# EAGLE board usbl (EAGLE 5.11)
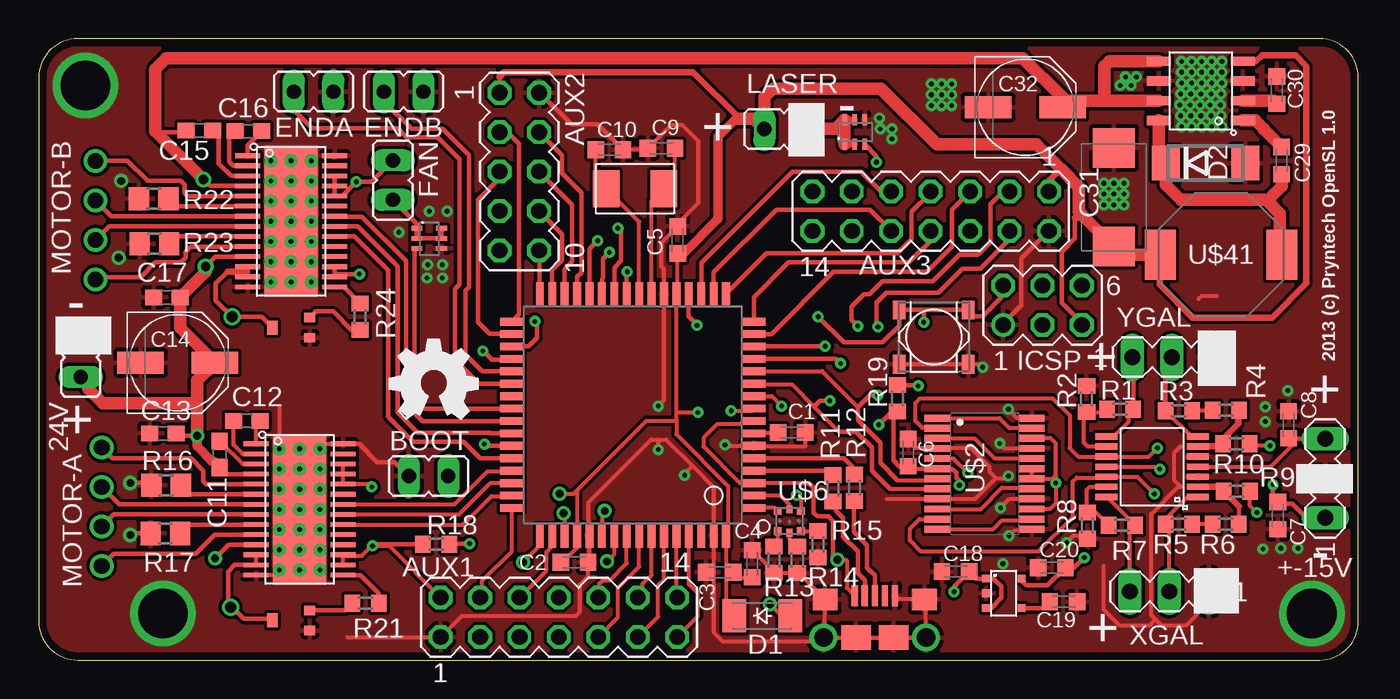
[diagram p0: board, top side]
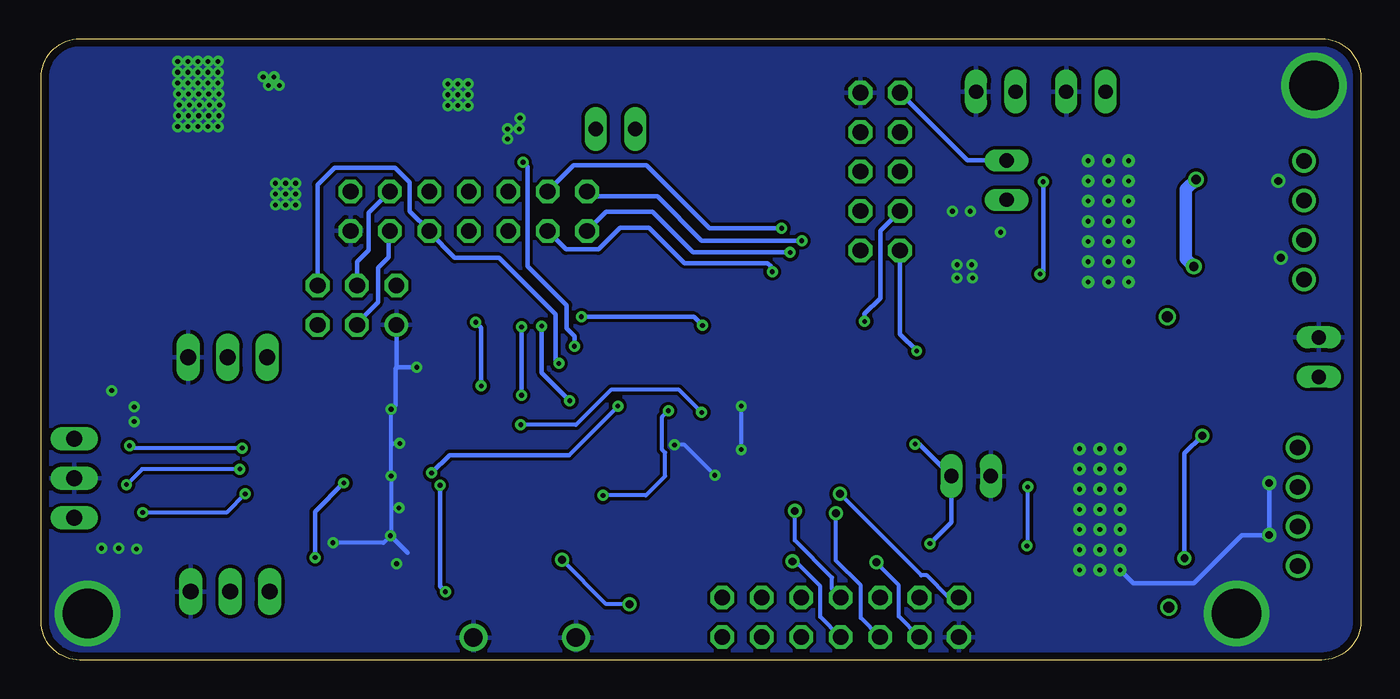
[diagram p1: board, bottom side, seen from below]

Size 85 x 40 mm. Coordinates in mm from the lower left corner, seen from the top.
Outline: 2.5,40 arc90 0,37.5 0,2.5 arc90 2.5,0 82.5,0 arc90 85,2.5 85,37.5 arc90 82.5,40 2.5,40
Copper layers (1*16): Top 0.035mm / dielectric 1.5mm / Bottom 0.035mm
Design rules "default *": minimum track width 10mil, minimum drill 0.3mm, track to track 8mil, track to pad 8mil, pad to pad 8mil, via to via 8mil, smd to smd 0mil, copper to edge 0.5mm, drill to drill 8mil, minimum pad ring 10mil, minimum via ring 8mil, stop-mask expansion 4mil, vias tented up to drill 0.6mm, thermal gap 10mil

## Footprints (pad centres in the part's own frame; a part is rotated, then mirrored left to right if it is on the bottom)
JP1 = drill 0.914 long: 1 0,-1.27; 2 0,1.27
MA03-1 = drill 1.016 long: 1 -2.54,0; 2 0,0; 3 2.54,0
MA07-2 = drill 1.016 octagon: 1 -7.62,-1.27; 2 -7.62,1.27; 3 -5.08,-1.27; 4 -5.08,1.27; 5 -2.54,-1.27; 6 -2.54,1.27; 7 0,-1.27; 8 0,1.27; 9 2.54,-1.27; 10 2.54,1.27; 11 5.08,-1.27; 12 5.08,1.27; 13 7.62,-1.27; 14 7.62,1.27
MA05-2 = drill 1.016 octagon: 1 -5.08,-1.27; 2 -5.08,1.27; 3 -2.54,-1.27; 4 -2.54,1.27; 5 0,-1.27; 6 0,1.27; 7 2.54,-1.27; 8 2.54,1.27; 9 5.08,-1.27; 10 5.08,1.27
C0603K = smd 1.05 x 1.08: 1 -0.875,0; 2 0.875,0
C0603 = smd 1.1 x 1: 1 -0.85,0; 2 0.85,0
PANASONIC_D = smd 3 x 1.4: + 2.4,0; - -2.4,0
D/7343-31R = smd 2.55 x 2.7: + 3.175,0; - -3.175,0
SOD-123_MINI-SMA = smd 1.5 x 2.1: A 1.8,0; C -1.8,0
DO214AA = smd 1.8 x 2.2: A 2.55,0; C -2.55,0
MA03-2 = drill 1.016 round: 1 -2.54,-1.27 | drill 1.016 octagon: 2 -2.54,1.27; 3 0,-1.27; 4 0,1.27; 5 2.54,-1.27; 6 2.54,1.27
1X04 = drill 1.016 round: 1 -2.54,0; 2 0,0; 3 2.54,0; 4 5.08,0
R0603 = smd 1 x 1.1: 1 -0.85,0; 2 0.85,0
R0805 = smd 1.3 x 1.5: 1 -0.95,0; 2 0.95,0
TQFP64 = smd 1.5 x 0.5: P$1 -7.8,6; P$2 -7.8,5.2; P$3 -7.8,4.4; P$4 -7.8,3.6; P$5 -7.8,2.8; P$6 -7.8,2; P$7 -7.8,1.2; P$8 -7.8,0.4; P$9 -7.8,-0.4; P$10 -7.8,-1.2; P$11 -7.8,-2; P$12 -7.8,-2.8; P$13 -7.8,-3.6; P$14 -7.8,-4.4; P$15 -7.8,-5.2; P$16 -7.8,-6; P$33 7.8,-6; P$34 7.8,-5.2; P$35 7.8,-4.4; P$36 7.8,-3.6; P$37 7.8,-2.8; P$38 7.8,-2; P$39 7.8,-1.2; P$40 7.8,-0.4; P$41 7.8,0.4; P$42 7.8,1.2; P$43 7.8,2; P$44 7.8,2.8; P$45 7.8,3.6; P$46 7.8,4.4; P$47 7.8,5.2; P$48 7.8,6 | smd 0.5 x 1.5: P$17 -6,-7.8; P$18 -5.2,-7.8; P$19 -4.4,-7.8; P$20 -3.6,-7.8; P$21 -2.8,-7.8; P$22 -2,-7.8; P$23 -1.2,-7.8; P$24 -0.4,-7.8; P$25 0.4,-7.8; P$26 1.2,-7.8; P$27 2,-7.8; P$28 2.8,-7.8; P$29 3.6,-7.8; P$30 4.4,-7.8; P$31 5.2,-7.8; P$32 6,-7.8; P$49 6,7.8; P$50 5.2,7.8; P$51 4.4,7.8; P$52 3.6,7.8; P$53 2.8,7.8; P$54 2,7.8; P$55 1.2,7.8; P$56 0.4,7.8; P$57 -0.4,7.8; P$58 -1.2,7.8; P$59 -2,7.8; P$60 -2.8,7.8; P$61 -3.6,7.8; P$62 -4.4,7.8; P$63 -5.2,7.8; P$64 -6,7.8
TSSOP24 = smd 1.635 x 0.44: P01 -3.05,3.575; P02 -3.05,2.925; P03 -3.05,2.275; P04 -3.05,1.625; P05 -3.05,0.975; P06 -3.05,0.325; P07 -3.05,-0.325; P08 -3.05,-0.975; P09 -3.05,-1.625; P10 -3.05,-2.275; P11 -3.05,-2.925; P12 -3.05,-3.575; P13 3.05,-3.575; P14 3.05,-2.925; P15 3.05,-2.275; P16 3.05,-1.625; P17 3.05,-0.975; P18 3.05,-0.325; P19 3.05,0.325; P20 3.05,0.975; P21 3.05,1.625; P22 3.05,2.275; P23 3.05,2.925; P24 3.05,3.575
TSSOP14 = smd 1.4 x 0.4: P$1 -2.95,1.95; P$2 -2.95,1.3; P$3 -2.95,0.65; P$4 -2.95,0; P$5 -2.95,-0.65; P$6 -2.95,-1.3; P$7 -2.95,-1.95; P$8 2.95,-1.95; P$9 2.95,-1.3; P$10 2.95,-0.65; P$11 2.95,0; P$12 2.95,0.65; P$13 2.95,1.3; P$14 2.95,1.95
TXC7A = smd 1.7 x 2.4: P$1 -1.85,0; P$2 1.85,0
MICROUSB = smd 1.6 x 1.4: GND1 -3.2,3.9; GND4 3.2,3.9 | smd 1.9 x 1.6: GND2 -1.2,1.45; GND3 1.2,1.45 | smd 0.4 x 1.35: P1 -1.3,4.15; P2 -0.65,4.15; P3 0,4.15; P4 0.65,4.15; P5 1.3,4.15 | drill 1.2 round: POST1 -3.3,1.45; POST2 3.3,1.45
OMRONLED = smd 0.5 x 0.5: P1 -0.75,-0.65; P3 0.75,-0.65; P4 0.75,0.65; P6 -0.75,0.65 | smd 0.4 x 0.5: P2 0,-0.75; P5 0,0.75
ETSSOP28 = smd 3.4 x 9.7: EPAD 0,0 | smd 1.6 x 0.3: P$1 -2.8,4.225; P$2 -2.8,3.575; P$3 -2.8,2.925; P$4 -2.8,2.275; P$5 -2.8,1.625; P$6 -2.8,0.975; P$7 -2.8,0.325; P$8 -2.8,-0.325; P$9 -2.8,-0.975; P$10 -2.8,-1.625; P$11 -2.8,-2.275; P$12 -2.8,-2.925; P$13 -2.8,-3.575; P$14 -2.8,-4.225; P$15 2.8,-4.225; P$16 2.8,-3.575; P$17 2.8,-2.925; P$18 2.8,-2.275; P$19 2.8,-1.625; P$20 2.8,-0.975; P$21 2.8,-0.325; P$22 2.8,0.325; P$23 2.8,0.975; P$24 2.8,1.625; P$25 2.8,2.275; P$26 2.8,2.925; P$27 2.8,3.575; P$28 2.8,4.225 | drill 0.3 pad 0.61 round: T0 -1.3,3.9; T1 0,3.9; T2 1.3,3.9; T3 -1.3,2.6; T4 0,2.6; T5 1.3,2.6; T6 -1.3,1.3; T7 0,1.3; T8 1.3,1.3; T9 -1.3,0; T10 0,0; T11 1.3,0; T12 -1.3,-1.3; T13 0,-1.3; T14 1.3,-1.3; T15 -1.3,-2.6; T16 0,-2.6; T17 1.3,-2.6; T18 -1.3,-3.9; T19 0,-3.9; T20 1.3,-3.9
POT22A = smd 0.6 x 0.7: L -0.65,-1.2; R 0.65,-1.2 | smd 0.9 x 0.7: POT 0,1.2
SOT363 = smd 0.7 x 0.3: P$1 -0.8,0.65; P$2 -0.8,0; P$3 -0.8,-0.65; P$4 0.8,-0.65; P$5 0.8,0; P$6 0.8,0.65
4PSWITCH = smd 0.8 x 1.2: P$1 -2.225,1.75; P$2 2.225,1.75; P$3 -2.225,-1.75; P$4 2.225,-1.75
TSOT23 = smd 0.5 x 0.5: P$1 0.95,1.15; P$2 0,1.15; P$3 -0.95,1.15; P$4 -0.95,-1.15; P$5 0.95,-1.15
SO8 = smd 1.55 x 0.6: P$1 -2.7,1.905; P$2 -2.705,0.635; P$3 -2.705,-0.635; P$4 -2.7,-1.905; P$5 2.7,-1.905; P$6 2.7,-0.635; P$7 2.7,0.635; P$8 2.7,1.905
INDUCTOR = smd 2 x 3.2: P$1 -3.9,0; P$2 3.9,0

## Placement (x,y rotation side)
24V  [JP1]  2.7,19.5 0 top
+-15V  [MA03-1]  82.86,11.7 90 top
AUX1  [MA07-2]  33.5,2.75 0 top
AUX2  [MA05-2]  30.95,31.45 270 top
AUX3  [MA07-2]  57.45,28.9 180 top
BOOT  [JP1]  25.1,11.85 270 top
C1  1u  [C0603K]  48.5,14.65 0 top
C2  0.1u  [C0603K]  34.5,6.3 180 top
C3  10u  [C0603K]  43.85,5.65 0 top
C4  0.1u  [C0603K]  45.95,6.2 270 top
C5  0.1u  [C0603K]  41.15,27.05 90 top
C6  0.1u  [C0603K]  56,13.35 270 top
C7  0.1u  [C0603K]  79.8,9.3 270 top
C8  0.1u  [C0603K]  80.5,15.15 270 top
C9  20p  [C0603K]  40.1,32.95 180 top
C10  20p  [C0603K]  36.75,32.85 0 top
C11  0.1u  [C0603]  11.65,13.25 270 top
C12  0.01u  [C0603]  13.4,15.4 0 top
C13  0.1u  [C0603]  8,14.6 180 top
C14  [PANASONIC_D]  8.95,19.15 0 top
C15  0.1u  [C0603]  10.35,34.1 180 top
C16  0.01u  [C0603]  13.5,34.05 0 top
C17  0.1u  [C0603]  8.25,23.35 180 top
C18  10u  [C0603K]  59.05,5.7 0 top
C19  10u  [C0603K]  66,3.75 180 top
C20  0.1u  [C0603K]  65.25,5.95 0 top
C29  0.1u  [C0603K]  80.05,32.15 90 top
C30  0.1u  [C0603K]  79.75,36.7 90 top
C31  68u  [D/7343-31R]  69.25,29.8 270 top
C32  100u  [PANASONIC_D]  63.55,35.6 0 top
D1  CGRM4001-G  [SOD-123_MINI-SMA]  46.6,2.85 0 top
D2  [DO214AA]  75.15,32 0 top
ENDA  [JP1]  17.7,36.6 90 top
ENDB  [JP1]  23.5,36.6 90 top
FAN  [JP1]  22.8,30.9 180 top
ICSP  [MA03-2]  64.65,22.85 0 top
LASER  [JP1]  48,34.2 270 top
MOTOR-A  [1X04]  4.05,8.6 90 top
MOTOR-B  [1X04]  3.65,27.05 90 top
R1  43k  [R0603]  69.65,16.16 180 top
R2  100k  [R0603]  67.49,16.81 90 top
R3  100k  [R0603]  73.42,16.06 180 top
R4  43k  [R0603]  76.47,16.09 180 top
R5  100k  [R0603]  73.42,8.74 180 top
R6  43k  [R0603]  76.44,8.74 180 top
R7  43k  [R0603]  69.77,8.69 180 top
R8  100k  [R0603]  67.53,8.66 270 top
R9  100k  [R0603]  77.16,10.88 180 top
R10  100k  [R0603]  77.14,13.93 180 top
R11  22R  [R0603]  51.15,11.05 270 top
R12  22R  [R0603]  52.55,11.1 270 top
R13  43k  [R0603]  47.35,6.45 270 top
R14  43k  [R0603]  48.85,6.45 270 top
R15  43k  [R0603]  50.2,7.45 270 top
R16  [R0805]  8.2,11.25 0 top
R17  [R0805]  8.15,8.15 0 top
R18  100k  [R0603]  25.6,7.45 0 top
R19  100k  [R0603]  55.3,16.85 90 top
R21  100k  [R0603]  21.05,3.65 0 top
R22  [R0805]  7.4,29.7 0 top
R23  [R0805]  7.45,26.8 0 top
R24  100k  [R0603]  20.7,22.1 90 top
U$1  AT90USB1286  [TQFP64]  38.27,15.79 180 top
U$2  AD5206  [TSSOP24]  60.92,12 0 top
U$3  OPA4171  [TSSOP14]  71.71,12.45 180 top
U$4  TXC7A  [TXC7A]  38.4,30.35 0 top
U$5  MICROUSB  [MICROUSB]  53.85,0 0 top
U$6  OMRONLED  [OMRONLED]  48.35,8.95 180 top
U$7  DRV8825  [ETSSOP28]  16.8,9.7 0 top
U$8  POT22A  [POT22A]  16.25,2.55 90 top
U$9  BSD816SN  [SOT363]  52.55,34 90 top
U$10  TL3315  [4PSWITCH]  57.65,20.8 0 top
U$11  DRV8825  [ETSSOP28]  16.25,28.25 0 top
U$12  POT22A  [POT22A]  16.25,21.4 90 top
U$13  BSD816SN  [SOT363]  25.15,27.15 0 top
U$14  CAT6219  [TSOT23]  62.15,4.3 90 top
U$15  [OSHW_FILLX200_NOTEXT]  22.6,15.55 0 top
U$40  MAX5035  [SO8]  74.85,36.65 180 top
U$41  100uH  [INDUCTOR]  76.15,26.1 0 top
XGAL  [MA03-1]  72.82,4.41 180 top
YGAL  [MA03-1]  72.98,19.5 0 top

## Library data of the parts
24V BOOT ENDA ENDB FAN LASER = jumper
+-15V AUX1-AUX3 ICSP XGAL YGAL = con-lstb; OC_FARNELL: unknown; OC_NEWARK: unknown
C1-C20 C29-C32 R1-R19 R21-R24 = rcl
D1 D2 = diode
MOTOR-A MOTOR-B = RepRapjr
U$1-U$14 U$40 U$41 = untitled
U$15 = ohw-logo

## Nets
+15: +-15V.3 C8.2 U$3.P$4
GND: 24V.2 +-15V.2 AUX1.1 AUX2.2 AUX3.2 BOOT.1 C1.2 C2.1 C3.1 C4.1 C5.2 C6.1 C7.2 C8.1 C9.2 C10.2 C13.2 C14.- C17.2 C18.1 C19.1 C20.1 C30.2 C31.- C32.- D2.A ENDA.1 ENDB.1 ICSP.1 R2.2 R8.2 R13.2 R14.2 R15.2 R16.1 R17.1 R22.1 R23.1 U$1.P$6 U$1.P$22 U$1.P$53 U$1.P$63 U$2.P04 U$2.P09 U$2.P13 U$2.P16 U$2.P21 U$2.P24 U$3.P$3 U$3.P$5 U$5.GND1 U$5.GND2 U$5.GND3 U$5.GND4 U$5.P5 U$5.POST1 U$5.POST2 U$7.EPAD U$7.P$14 U$7.P$28 U$7.T0 U$7.T1 U$7.T2 U$7.T3 U$7.T4 U$7.T5 U$7.T6 U$7.T7 U$7.T8 U$7.T9 U$7.T10 U$7.T11 U$7.T12 U$7.T13 U$7.T14 U$7.T15 U$7.T16 U$7.T17 U$7.T18 U$7.T19 U$7.T20 U$8.L U$9.P$4 U$10.P$3 U$10.P$4 U$11.EPAD U$11.P$14 U$11.P$28 U$11.T0 U$11.T1 U$11.T2 U$11.T3 U$11.T4 U$11.T5 U$11.T6 U$11.T7 U$11.T8 U$11.T9 U$11.T10 U$11.T11 U$11.T12 U$11.T13 U$11.T14 U$11.T15 U$11.T16 U$11.T17 U$11.T18 U$11.T19 U$11.T20 U$12.L U$13.P$4 U$14.P$2 U$40.P$3 U$40.P$6 XGAL.1 YGAL.3
N$1: U$2.P10 U$2.P17
N$2: U$2.P12 U$2.P14
N$3: C20.2 U$2.P15 U$2.P18 U$2.P19 U$2.P22 U$14.P$5
N$4: R11.1 U$1.P$4
N$5: U$2.P03 U$2.P20
N$6: U$2.P01 U$2.P23
N$7: R4.1 R10.2 U$3.P$6
N$8: R9.1 U$2.P11 U$3.P$12
N$9: R12.1 U$1.P$5
N$10: U$1.P$10 U$2.P05
N$11: AUX3.4 ICSP.3 U$1.P$12 U$2.P07
N$12: AUX3.3 ICSP.4 U$1.P$11 U$2.P08
N$13: R1.1 U$3.P$8 YGAL.1
N$14: R1.2 R2.1 U$3.P$9
N$15: R3.2 U$3.P$7 YGAL.2
N$16: R3.1 R4.2
N$17: R5.2 U$3.P$1 XGAL.2
N$18: R5.1 R6.2
N$19: R7.1 U$3.P$14 XGAL.3
N$20: R7.2 R8.1 U$3.P$13
N$21: R6.1 R9.2 U$3.P$2
N$22: R11.2 U$5.P2
N$23: R12.2 U$5.P3
N$24: D1.A U$1.P$3 U$1.P$8 U$5.P1
N$25: R10.1 U$2.P02 U$3.P$10
N$26: U$11.P$12 U$11.P$13 U$12.POT
N$27: C1.1 U$1.P$7
N$28: U$1.P$9 U$6.P1
N$29: U$1.P$2 U$6.P2
N$30: U$1.P$1 U$6.P3
N$31: R13.1 U$6.P4
N$32: +-15V.1 C7.1 U$3.P$11
N$33: R21.2 U$7.P$15
N$34: R14.1 U$6.P5
N$35: R15.1 U$6.P6
N$36: AUX1.13 U$1.P$61
N$37: C9.1 U$1.P$23 U$4.P$2
N$38: C10.1 U$1.P$24 U$4.P$1
N$39: AUX1.14 U$1.P$60
N$40: AUX1.11 U$1.P$59
N$41: AUX1.12 U$1.P$58
N$42: AUX1.10 U$1.P$56
N$43: AUX1.9 U$1.P$57
N$44: AUX1.7 U$1.P$55
N$45: AUX1.8 U$1.P$54
N$46: AUX1.5 U$1.P$51
N$47: AUX1.6 U$1.P$50
N$48: AUX1.3 U$1.P$49
N$49: AUX1.4 U$1.P$48
N$50: C12.2 U$7.P$1
N$51: C12.1 U$7.P$2
N$52: U$7.P$12 U$7.P$13 U$8.POT
N$53: MOTOR-A.3 U$7.P$7
N$54: U$1.P$47 U$7.P$20
N$55: U$1.P$46 U$7.P$21
N$56: U$1.P$45 U$7.P$22
N$57: R16.2 U$7.P$6
N$58: R17.2 U$7.P$9
N$59: C11.1 U$7.P$3
N$60: R21.1 U$8.R
N$61: MOTOR-A.2 U$7.P$8
N$62: MOTOR-A.4 U$7.P$5
N$63: MOTOR-A.1 U$7.P$10
N$64: U$1.P$44 U$11.P$20
N$65: U$1.P$42 U$11.P$21
N$66: U$1.P$41 U$11.P$22
N$67: R22.2 U$11.P$6
N$68: R23.2 U$11.P$9
N$69: C16.2 U$11.P$1
N$70: C16.1 U$11.P$2
N$71: C15.1 U$11.P$3
N$72: MOTOR-B.3 U$11.P$7
N$73: MOTOR-B.2 U$11.P$8
N$74: MOTOR-B.4 U$11.P$5
N$75: MOTOR-B.1 U$11.P$10
N$76: R24.2 U$11.P$15
N$77: R24.1 U$12.R
N$78: U$1.P$40 U$13.P$3
N$79: FAN.2 U$13.P$1 U$13.P$2 U$13.P$5 U$13.P$6
N$80: BOOT.2 R18.2 U$1.P$43
N$81: ENDB.2 U$1.P$37
N$82: AUX2.10 U$1.P$32
N$83: LASER.2 U$9.P$1 U$9.P$2 U$9.P$5 U$9.P$6
N$84: U$1.P$14 U$9.P$3
N$85: AUX2.8 U$1.P$31
N$86: AUX2.6 U$1.P$30
N$87: AUX2.4 U$1.P$29
N$88: AUX2.9 U$1.P$36
N$89: AUX2.7 U$1.P$35
N$90: AUX2.5 U$1.P$34
N$91: AUX2.3 U$1.P$33
N$92: AUX3.13 U$1.P$28
N$93: AUX3.14 U$1.P$27
N$94: AUX3.11 U$1.P$26
N$95: AUX3.12 U$1.P$25
N$96: AUX3.9 U$1.P$19
N$97: AUX3.10 U$1.P$18
N$98: AUX3.7 U$1.P$17
N$99: AUX3.8 U$1.P$16
N$100: AUX3.5 U$1.P$15
N$101: AUX3.6 ICSP.6 U$1.P$13
N$102: ENDA.2 U$1.P$38
N$103: ICSP.2 R19.2 U$1.P$20 U$10.P$1 U$10.P$2
N$104: C29.2 U$40.P$1
N$105: C29.1 D2.C U$40.P$8 U$41.P$2
N$106: C30.1 U$40.P$2
N$110: C19.2 U$14.P$4
VCC: AUX1.2 AUX2.1 AUX3.1 C2.2 C3.2 C4.2 C5.1 C6.2 C18.2 C31.+ D1.C FAN.1 ICSP.5 LASER.1 R18.1 R19.1 U$1.P$21 U$1.P$52 U$1.P$64 U$2.P06 U$7.P$16 U$7.P$17 U$7.P$24 U$7.P$25 U$7.P$26 U$11.P$16 U$11.P$17 U$11.P$24 U$11.P$25 U$11.P$26 U$14.P$1 U$14.P$3 U$40.P$4 U$41.P$1
VMOT: 24V.1 C11.2 C13.1 C14.+ C15.2 C17.1 C32.+ U$7.P$4 U$7.P$11 U$11.P$4 U$11.P$11 U$40.P$5 U$40.P$7

## Tracks (layer width: path | path; a pad name or v marks a point on that pad's centre or on a via)
+15
  Top 0.254: U$3.P$4 79.35,12.45 80.7,13.8
  Top 0.305: +-15V.3 80.53,14.24 C8.2 80.7,14.07 80.7,13.8
GND  (via drill 0.3, 0.5, 3.2)
  Top 0.254: 73.47,11.22 73.55,11.15 | 73.47,11.22 73.15,11.55 73.15,13.35 73.55,13.75 | YGAL.3 75.52,20.28 | 75.85,23.45 74.9,23.45 74.7,23.25 | XGAL.1 75.36,3.71 73.9,2.25 72.3,2.25 71.92,2.62 | 71.92,2.62 71.65,2.9 71.65,9.4 73.47,11.22 | U$2.P24 63.02,15.57 v62.45,16.15 | v62.5,8 62.85,8.35 63.9,8.35 U$2.P13 | 61.65,11.7 60.33,10.38 U$2.P09 54.62,10.38 | 61.65,11.7 62.4,11.7 62.45,11.75 v62.45,11.85 | U$2.P16 62.52,10.38 v61.95,9.8 | U$2.P21 62.23,13.62 v61.9,13.95 | 61.65,11.7 61.25,12.1 61.25,12.4 60.02,13.62 U$2.P04 57.84,13.65 56.45,13.65 56.45,13.78 C6.1 | 68.6,6.05 68.6,3.25 69.6,2.25 71.55,2.25 71.92,2.62 | 67.98,8.02 66.67,8.02 v66.2,7.55 | 42.1,12.5 40.4,14.2 39.9,14.2 | 42.1,12.5 43.47,11.13 U$1.P$63 43.47,5.65 | 39.9,14.2 39.45,14.2 35.4,10.15 35.4,8.06 U$1.P$53 35.47,6.29 C2.1 35.38,5.38 34.85,4.85 34.85,3.1 34.6,2.85 27.25,2.85 AUX1.1 19.87,1.48 | 50.17,1.07 U$5.POST1 | 50.17,1.07 50.05,0.95 | U$5.POST1 50.65,1.55 U$5.GND1 48.95,5.6 R14.2 | U$5.POST1 U$5.GND2 U$5.GND3 U$5.POST2 57.15,3.8 U$5.GND4 55.4,3.9 U$5.P5 | v44.2,13.85 44.26,13.79 U$1.P$6 46.11,13.75 49.35,13.75 49.38,13.78 C1.2 | v41.6,11.9 41.6,12 42.1,12.5 | 43.47,5.65 43.47,5.25 | 43.47,5.25 43.42,5.3 | 47.65,6 47.4,6 47.02,6 C4.1 | C10.2 39.12,32.85 C9.2 40.73,34.45 41.45,34.45 42.5,33.4 42.5,29.45 41.15,28.1 C5.2 40.1,26.88 40.1,25.35 40.27,25.18 U$1.P$22 40.27,16.72 v39.9,16.35 | 43.47,5.65 C3.1 | R14.2 R13.2 | R14.2 49.15,5.6 | 43.47,5.25 43.47,1.78 44.05,1.2 50.05,1.2 50.17,1.07 | 39.9,14.2 v39.9,13.55 | U$7.P$14 15.18,5.47 U$7.T18 U$7.T15 U$7.T12 U$7.T9 U$7.T6 U$7.T3 U$7.T0 | U$7.T0 U$7.T1 U$7.T2 | U$7.T5 U$7.T4
  Top 0.254: U$7.T7 U$7.EPAD U$7.T13 U$7.T16 U$7.T19 | U$7.T19 U$7.T20 U$7.T17 U$7.T14 U$7.T11 U$7.T8 U$7.T5 | U$7.P$28 18.43,13.93 U$7.T2 | U$7.T2 U$7.T5 | U$7.T19 16.95,5.65 | U$7.T0 15.5,16.3
  Top 0.305: R17.1 6,8.15 v5.9,8.05 | v5.9,11.4 7.1,11.4 R16.1 | R13.2 47.35,5.95 47.4,6 | U$7.P$28 20.62,13.93 21.8,12.75 22.93,12.75 BOOT.1 | AUX2.2 32.27,36.53 34.3,34.5 35.98,34.5 C10.2 | ICSP.1 62.11,21.66 63.3,22.85 63.3,25.86 AUX3.2 | U$10.P$3 U$10.P$4 60.6,19.05 v60.8,18.85
  Bottom 0.254: v62.45,11.85 62.45,9.8 | 62.45,9.8 62.45,8.05 v62.5,8 62.95,7.55 v66.2,7.55 | v62.45,11.85 62.45,13.8 | 62.45,13.8 62.45,16.1 v62.45,16.15 | v62.45,11.85 62.45,11.8 | 62.45,9.8 v61.95,9.8 | v61.9,13.95 62.3,13.95 62.45,13.8 | v44.2,13.85 43.55,13.85 v41.6,11.9 | v39.9,16.35 v39.9,13.55 39.9,13.4
  Bottom 0.305: v5.9,11.4 v5.9,8.05 7.65,8.05 10.75,4.95 14.65,4.95 U$7.T18 | v60.8,18.85 62.06,18.85 | v62.5,8 61.4,6.9 | 62.16,18.8 62.16,16.39 62.45,16.1 62.45,16.2 | ICSP.1 62.11,18.84 62.15,18.8 62.1,18.8
  other vias: 62.1,6.2 8,3 82,3 69.65,37 70.35,37 70,37.55 70.7,37.55 73.6,38.55 74.25,38.55 74.9,38.55 75.55,38.55 76.2,38.55 73.6,37.85 74.25,37.85 74.9,37.85 75.55,37.85 76.2,37.85 73.6,37.15 74.25,37.15 74.9,37.15 75.55,37.15 76.2,37.15 73.55,36.45 74.2,36.45 74.85,36.45 75.5,36.45 76.15,36.45 73.5,35.75 74.15,35.75 74.8,35.75 75.45,35.75 76.1,35.75 73.55,35.05 74.2,35.05 74.85,35.05 75.5,35.05 76.15,35.05 73.6,34.35 74.25,34.35 74.9,34.35 75.55,34.35 76.2,34.35 57.5,37.1 58.15,37.1 58.8,37.1 57.5,36.4 58.15,36.4 58.8,36.4 57.5,35.7 58.15,35.7 58.8,35.7 68.6,30.7 69.25,30.7 69.9,30.7 68.6,30 69.25,30 69.9,30 68.6,29.3 69.25,29.3 69.9,29.3 54.15,34.9 54.2,34.2 54.95,34.2 54.95,33.55 25.05,25.45 26,25.45 26,24.6 25,24.6 26.3,28.9 25.15,28.9 23.2,27.55 3,37 5.15,25.9 5.3,30.85 81.1,7.2 80,7.2 78.85,7.15 79,15.35 79,16.3 80.45,17.35
  pour Top: -1,40.6 103.7,42.35 103.3,-2.45 -5.85,-1.45 -3.85,36.85
  pour Bottom: -1.85,43.15 105.3,43.15 105.3,-2.45 -10,-2.45 -10,37
N$1
  Top 0.254: U$2.P10 60.67,9.72 62.05,11.1 63.9,11.1 U$2.P17
N$2
  Top 0.254: U$2.P12 61.48,8.43 62.05,9 63.9,9 U$2.P14
N$3  (via drill 0.3)
  Top 0.254: U$2.P15 65.12,9.72 65.5,10.1 v65.5,11.4 65.25,11.65 | 65.25,11.65 63.99,11.65 U$2.P18 U$2.P19 | U$2.P22 65.17,14.28 65.5,13.95 65.5,11.9 65.25,11.65
  Top 0.305: v67.35,6.6 66.65,5.9 66.17,5.9 C20.2 64.97,4.8 63.6,4.8 63.3,5.1 U$14.P$5 | v65.5,11.4 65.5,11.9
  Bottom 0.305: v67.35,6.6 67.35,9.55 v65.5,11.4
N$4
  Top 0.305: U$1.P$4 50.86,12.19 R11.1
N$5
  Top 0.254: U$2.P03 60.27,14.28 61.55,13 63.95,13 U$2.P20
N$6
  Top 0.254: U$2.P01 61.88,15.57 62.5,14.95 63.95,14.95 U$2.P23
N$7
  Top 0.406: U$3.P$6 76.29,13.75 R10.2 76.29,14.24 77.25,15.2 77.25,16.02 R4.1
N$8  (via drill 0.3)
  Top 0.254: R9.1 78.01,9.94 v78.45,9.5 | v71.85,10.7 70.75,11.8 U$3.P$12 68.71,11.75 66.85,11.75 66.6,11.5 66.6,9.2 64.4,7 56.8,7 56.1,7.7 56.1,8.45 56.73,9.07 U$2.P11
  Bottom 0.254: v78.45,9.5 73.05,9.5 v71.85,10.7
N$9
  Top 0.305: U$1.P$5 51.86,12.99 52.4,12.45 52.4,12.1 R12.1
N$10  (via drill 0.3)
  Top 0.254: U$2.P05 58.92,12.97 v59.85,12.05 | v47.85,16.35 47.21,16.99 U$1.P$10
  Bottom 0.254: v47.85,16.35 51,13.2
  Bottom 0.305: 51,13.2 58.7,13.2 v59.85,12.05
N$11  (via drill 0.3)
  Top 0.254: U$2.P07 57.78,11.59 55.31,11.59 | U$1.P$12 50.45,18.6 52.77,16.27
  Top 0.305: AUX3.4 62.53,27.08 60.65,25.2 59.5,25.2 57.95,23.65 54.6,23.65 53.95,23 53.95,21.55 v54.05,21.45 | v54.05,17.05 53.55,17.05 52.77,16.27 52.77,15.43 54.2,14 54.2,12.7 55.31,11.59
  Bottom 0.305: v54.05,17.05 v54.05,21.45 | ICSP.3 64.65,21.7 63.3,23.05 63.3,25.25 62.6,25.95 62.6,27.56 AUX3.4
N$12  (via drill 0.3)
  Top 0.254: U$1.P$11 46.11,17.75 48.5,17.75 49.92,16.32 51.55,14.7 | 54.83,11.03 U$2.P08
  Top 0.305: AUX3.3 62.12,30.17 61.3,29.35 61.3,26.9 60.5,26.1 59.3,26.1 57.6,24.4 54.35,24.4 53.5,23.55 53.15,23.55 52.35,22.75 52.35,21.9 v52.75,21.5 | v50.95,16.7 50.3,16.7 49.92,16.32 | 51.55,14.7 52.65,14.7 53.65,13.7 53.65,12.2 54.83,11.03
  Bottom 0.305: v52.75,21.5 52.75,18.5 v50.95,16.7 | ICSP.4 64.65,25.65 63.9,26.4 63.9,28.8 AUX3.3
N$13
  Top 0.254: U$3.P$8 69.25,14.4 70.2,15.35 70.2,15.86 R1.1
  Top 0.305: R1.1 70.5,19.44 YGAL.1
N$14
  Top 0.254: U$3.P$9 67.55,13.75 67.3,14 67.3,15.77 R2.1 68.6,15.96 R1.2
N$15
  Top 0.254: U$3.P$7 74.23,14.4 R3.2
  Top 0.305: R3.2 72.57,19.09 YGAL.2
N$16
  Top 0.254: R3.1 75.59,16.06 R4.2
N$17
  Top 0.254: 74.23,10.5 U$3.P$1 74,10.5 72.57,9.07 R5.2 72.82,8.49 XGAL.2
N$18
  Top 0.254: R6.2 R5.1
N$19
  Top 0.254: U$3.P$14 68.81,10.5 70.28,9.03 | 70.28,9.03 R7.1 | XGAL.3 70.28,9.03
N$20
  Top 0.254: 68.7,8.69 R7.2 68.1,9.51 R8.1 67.5,9.54 67.5,10.95 67.7,11.15 U$3.P$13
N$21
  Top 0.254: 77.29,9.9 R6.1
  Top 0.406: U$3.P$2 76.04,11.15 R9.2 77.29,9.9
N$22
  Top 0.305: U$5.P2 53.2,5.15 52.75,5.6 52.75,7 51.8,7.95 51.8,9.15 51.35,9.6 51.35,10 R11.2
N$23
  Top 0.305: U$5.P3 53.85,5.45 53.35,5.95 53.35,7.4 52.5,8.25 52.5,10.2 R12.2
N$24  (via drill 0.5)
  Top 0.254: 49.01,11.39 U$1.P$3 45.16,11.39 42.8,13.75 42.85,13.75 42.85,14.35 43.7,15.2 45.2,15.2 45.4,15.4 U$1.P$8 | U$5.P1 52.05,4.65 52.05,6.4 52,6.45 v51.45,6.45 | D1.A 47.85,2.85 v47.1,3.6
  Top 0.305: 49.01,11.39 49.61,11.39 49.9,11.1 49.9,9.5 50.15,9.25 50.85,9.25 51.15,8.95 51.15,6.75 v51.45,6.45
  Bottom 0.254: v47.1,3.6 48.6,3.6 v51.45,6.45
N$25  (via drill 0.3)
  Top 0.254: v72.05,13.65 71.5,13.1 U$3.P$10 66.95,13.1 66.4,13.65 66.4,15.75 65.3,16.85 56.75,16.85 56.45,16.55 56.45,15.4 56.9,14.95 57.84,14.95 U$2.P02 | v79.3,13.8 78.12,13.8 R10.1
  Bottom 0.254: v72.05,13.65 79.15,13.65 v79.3,13.8
N$26  (via drill 0.7)
  Top 0.305: U$11.P$12 U$11.P$13 13.45,24.85 13.3,25 | 12.15,25 11.4,24.25 11.4,23.15 v12.45,22.1 14.35,22.1 U$12.POT
  Top 0.406: 12.15,25 13.3,25
N$27
  Top 0.254: U$1.P$7 47.56,14.59 C1.1
N$28  (via drill 0.3)
  Top 0.254: v44.6,16.05 45.93,16.05 U$1.P$9 | U$6.P1 49.1,10.3 v48.8,10.6
  Bottom 0.254: v48.8,10.6 46.05,10.6 44.8,11.85 44.8,13.35 45,13.55 45,15.65 v44.6,16.05
N$29
  Top 0.254: U$1.P$2 47.76,10.59 48.35,10 U$6.P2
N$30
  Top 0.254: U$1.P$1 47.41,9.79 U$6.P3
N$31
  Top 0.254: U$6.P4 47.6,7.55 R13.1
N$32  (via drill 0.3)
  Top 0.254: v72.2,12.3 72.05,12.45 U$3.P$11
  Top 0.305: +-15V.1 81.64,9.16 80.75,10.05 79.92,10.05 C7.1 79.5,10.47 v79.5,11.3
  Bottom 0.254: v79.5,11.3 78.5,12.3 v72.2,12.3
N$33
  Top 0.305: U$7.P$15 20.73,5.47 21.9,4.3 R21.2
N$34
  Top 0.254: U$6.P5 48.35,7.8 R14.1
N$35
  Top 0.254: U$6.P6 R15.1 50.45,8.3
  Top 0.305: 50.45,8.3 50.4,8.35
  Top 0.406: 50.4,8.35 50.25,8.35 R15.1
N$36
  Top 0.254: U$1.P$61 41.87,4.88 42.45,4.3 42.45,2.81 AUX1.13
N$37
  Top 0.254: U$1.P$23 39.47,29.57 U$4.P$2 40.98,31.07 C9.1
N$38
  Top 0.254: U$1.P$24 38.67,28.23 U$4.P$1 35.88,31.02 C10.1
N$39
  Top 0.254: U$1.P$60 41.07,4.07 AUX1.14
N$40
  Top 0.254: U$1.P$59 40.27,5.17 39.9,4.8 39.9,2.8 AUX1.11
N$41
  Top 0.254: U$1.P$58 39.47,5.47 38.9,4.9 38.9,4.34 AUX1.12
N$42
  Top 0.254: U$1.P$56 37.87,6.22 36.8,5.15 36.35,5.15 36.1,4.9 36.1,4.08 AUX1.10
N$43
  Top 0.254: U$1.P$57 38.67,6.02 37.3,4.65 37.3,2.74 AUX1.9
N$44  (via drill 0.5)
  Top 0.254: U$1.P$55 37.07,6.82 v36.6,6.35
  Bottom 0.254: v36.6,6.35 36.4,6.35 34.8,4.75 34.8,2.78 AUX1.7
N$45  (via drill 0.5)
  Top 0.254: U$1.P$54 36.27,9.42 v36.45,9.6
  Bottom 0.254: v36.45,9.6 36.45,7.7 34.05,5.3 34.05,4.57 AUX1.8
N$46  (via drill 0.5)
  Top 0.254: U$1.P$51 33.87,9.38 v33.8,9.45
  Bottom 0.254: v33.8,9.45 33.8,6.4 32.2,4.8 32.2,2.72 AUX1.5
N$47
  Top 0.254: U$1.P$50 33.07,7.32 32.7,6.95 32.7,5.76 AUX1.6
N$48  (via drill 0.5)
  Top 0.254: U$1.P$49 32.2,7.92 32.2,7.3 v31.2,6.3
  Bottom 0.254: v31.2,6.3 31.2,6.25 29.75,4.8 29.75,2.81 AUX1.3
N$49
  Top 0.254: U$1.P$48 30.47,7.02 28.55,5.1 28.55,4.15 AUX1.4
N$50
  Top 0.254: U$7.P$1 14,15.15 C12.2
N$51
  Top 0.254: U$7.P$2 13.12,13.28 12.55,13.85 C12.1
N$52  (via drill 0.7)
  Top 0.254: U$7.P$13 U$7.P$12
  Top 0.305: U$7.P$13 12.62,6.12 12.2,5.7 12.2,3.65 12.38,3.48 | 12.38,3.48 13.2,2.65 14.95,2.65 U$8.POT | v12.35,3.4 12.35,3.42 arc-45 12.38,3.48
N$53
  Top 0.305: U$7.P$7 5.17,10.03 MOTOR-A.3
N$54
  Top 0.254: U$7.P$20 27.32,8.72 29.15,10.55 30.43,10.55 U$1.P$47
N$55
  Top 0.254: U$7.P$21 27.07,9.38 29.1,11.4 U$1.P$46
N$56
  Top 0.254: U$7.P$22 26.77,10.03 28.9,12.15 30.43,12.15 U$1.P$45
N$57
  Top 0.254: R16.2 9.72,10.68
  Top 0.305: 9.72,10.68 U$7.P$6
N$58
  Top 0.254: R17.2 9.68,8.72
  Top 0.305: 9.68,8.72 U$7.P$9
N$59
  Top 0.254: U$7.P$3 13.12,12.62 C11.1
N$60
  Top 0.305: 20.15,3.7 R21.1 19.75,3.2 U$8.R
N$61
  Top 0.305: U$7.P$8 4.83,9.38 MOTOR-A.2
N$62
  Top 0.254: 4.13,13.6 MOTOR-A.4 4.28,13.45
  Top 0.305: MOTOR-A.4 4.73,13 9.8,13 10.6,12.2 10.6,11.5 10.78,11.32 U$7.P$5
N$63
  Top 0.305: U$7.P$10 11.32,8.07 10.1,6.85 4.84,6.85 MOTOR-A.1
N$64
  Top 0.305: U$1.P$44 28.41,12.99 27.35,14.05 24.1,14.05 22.5,15.65 22.5,25.1 20.3,27.3 19.07,27.3 U$11.P$20
N$65
  Top 0.305: U$1.P$42 29.11,14.59 29.05,14.65 24.4,14.65 23.1,15.95 23.1,25.35 20.52,27.93 U$11.P$21
N$66
  Top 0.305: U$1.P$41 24.71,15.39 23.65,16.45 23.65,25.7 20.8,28.55 19.07,28.55 U$11.P$22
N$67
  Top 0.305: U$11.P$6 8.72,29.23 8.72,29.32 R22.2
N$68
  Top 0.305: U$11.P$9 8.88,27.27 R23.2
N$69
  Top 0.305: U$11.P$1 13.45,33.15 C16.2
N$70
  Top 0.305: U$11.P$2 12.53,31.82 12.25,32.1 12.25,33.65 C16.1
N$71
  Top 0.305: U$11.P$3 12.38,31.18 11.6,31.95 11.6,33.7 C15.1
N$72
  Top 0.305: U$11.P$7 4.67,28.57 MOTOR-B.3
N$73
  Top 0.305: U$11.P$8 4.53,27.93 MOTOR-B.2
N$74
  Top 0.305: U$11.P$5 9.57,29.88 9.4,30.05 9.4,30.6 9.15,30.85 7,30.85 5.7,32.15 3.67,32.15 MOTOR-B.4
N$75
  Top 0.305: U$11.P$10 9.78,26.62 9.45,26.3 9.45,25.9 9.15,25.6 7.5,25.6 6.55,24.65 3.79,24.65 MOTOR-B.1
N$76
  Top 0.305: U$11.P$15 19.62,24.02 R24.2
N$77
  Top 0.305: R24.1 20.15,21.25 18.95,22.45 17.8,22.45 17.8,22.4 U$12.R
N$78
  Top 0.305: U$1.P$40 24.86,16.19 24.2,16.85 24.2,26.35 U$13.P$3
N$79
  Top 0.305: U$13.P$6 U$13.P$5 U$13.P$2 U$13.P$1 24.35,28.08 FAN.2
N$80  (via drill 0.3)
  Top 0.305: U$1.P$43 28.81,13.79 v28.7,13.9 | v27.75,7.5 26.5,7.5 R18.2
  Bottom 0.305: v28.7,13.9 28.42,13.9 BOOT.2 26.37,8.88 v27.75,7.5
N$81
  Top 0.305: U$1.P$37 28.56,18.59 27.5,19.65 27.5,23.8 27.7,24 27.7,32.5 26,34.2 24,34.2 22.25,35.95 22.25,36.58 ENDB.2
N$82
  Top 0.305: U$1.P$32 32.27,26.32 AUX2.10
N$83
  Top 0.406: U$9.P$6 U$9.P$5 | U$9.P$1 U$9.P$2
  Top 0.813: LASER.2 51.3,34.2 U$9.P$6 U$9.P$1
N$84  (via drill 0.3)
  Top 0.305: U$1.P$14 v50.64,20.19 v50.65,20.2 | v53.95,32.05 53.95,32.45 U$9.P$3
  Bottom 0.305: v50.65,20.2 50.65,20.85 51.15,21.35 51.15,22.85 53.65,25.35 53.65,31.75 v53.95,32.05
N$85
  Top 0.305: U$1.P$31 33.07,25.12 33.7,25.75 33.7,27.43 AUX2.8
N$86
  Top 0.305: U$1.P$30 33.87,25.17 34.35,25.65 34.35,29.32 AUX2.6
N$87
  Top 0.305: U$1.P$29 34.67,24.67 34.95,24.95 34.95,30.1 33.7,31.35 33.7,32.51 AUX2.4
N$88  (via drill 0.3)
  Top 0.305: v28.6,19.9 28.65,19.9 29.2,19.35 30.43,19.35 U$1.P$36
  Bottom 0.305: AUX2.9 29.68,20.98 v28.6,19.9
N$89  (via drill 0.3)
  Top 0.305: U$1.P$35 31.54,20.19 32.1,20.75 32.1,21.65 v31.95,21.8
  Bottom 0.305: v31.95,21.8 31.95,22.3 30.95,23.3 30.95,27.64 AUX2.7
N$90
  Top 0.305: AUX2.5 29.68,31.03 28.3,29.65 28.3,21.75 29.05,21 U$1.P$34
N$91
  Top 0.305: AUX2.3 30.21,33.99 30.95,33.25 30.95,22.27 U$1.P$33
N$92  (via drill 0.3)
  Top 0.305: U$1.P$28 35.47,26.47 v36,27
  Bottom 0.305: v36,27 42.45,27 45.3,29.85 49.51,29.85 AUX3.13
N$93  (via drill 0.3)
  Top 0.305: U$1.P$27 36.27,24.52 36.35,24.6 36.35,25.85 v36.75,26.25
  Bottom 0.305: v36.75,26.25 43,26.25 45.6,28.85 48.61,28.85 AUX3.14
N$94  (via drill 0.3)
  Top 0.305: v37.3,27.8 37.5,27.6 37.5,25.7 37.07,25.27 U$1.P$26
  Bottom 0.305: v37.3,27.8 41.95,27.8 46,31.85 50.69,31.85 AUX3.11
N$95  (via drill 0.3)
  Top 0.305: U$1.P$25 37.87,24.97 v37.9,25
  Bottom 0.305: AUX3.12 51.19,26.45 49.1,26.45 47.7,27.85 45.85,27.85 43.55,25.55 38.2,25.55 38,25.35 38,25.1 v37.9,25
N$96
  Top 0.305: U$1.P$19 42.67,25.57 48.55,31.45 52.95,31.45 54.23,30.17 AUX3.9
N$97
  Top 0.305: U$1.P$18 43.47,24.97 47.5,29 53.54,29 AUX3.10
N$98
  Top 0.305: AUX3.7 57.45,30.1 56.2,28.85 56.2,27.1 55.3,26.2 46.88,26.2 U$1.P$17
N$99
  Top 0.305: U$1.P$16 46.07,23.37 48.3,25.6 56.05,25.6 57.45,27 AUX3.8
N$100
  Top 0.305: U$1.P$15 47.19,20.99 51.2,25 57.2,25 58.8,26.6 58.8,28.98 AUX3.5
N$101  (via drill 0.3)
  Top 0.305: U$1.P$13 51.36,19.39 v51.65,19.1
  Bottom 0.305: ICSP.6 67.19,30.61 66.1,31.7 62.2,31.7 61.25,30.75 61.25,28.89 AUX3.6 59.99,27.54 58.35,25.9 55.5,25.9 51.85,22.25 51.85,19.3 v51.65,19.1
N$102
  Top 0.305: ENDA.2 16.43,35.42 17.6,34.25 23.1,34.25 23.7,33.65 25.7,33.65 27.1,32.25 27.1,24.2 26.8,23.9 26.8,19.35 28.35,17.8 U$1.P$38
N$103  (via drill 0.3)
  Top 0.305: ICSP.2 62.11,23.46 60.8,22.15 60.27,22.15 U$10.P$2 57,22.55 | 57,22.55 U$10.P$1 55.42,21.52 54.35,20.45 51.85,20.45 v50.2,22.1 | v42.4,21.55 42.4,21.6 41.85,22.15 41.85,23.57 U$1.P$20 | 56.5,17.8 v56.65,17.65 56.6,17.7 R19.2 | 57,22.55 v57,21.75
  Bottom 0.305: v50.2,22.1 42.95,22.1 v42.4,21.55 | v56.65,17.65 56.65,21.4 v57,21.75
N$104
  Top 0.813: U$40.P$1 78.36,34.74 78.9,34.2 78.9,34.17 C29.2
N$105
  Top 0.813: U$40.P$8 72.15,32.45 D2.C 72.6,30.6 73.55,29.65 79.05,29.65 79.12,29.57 | 79.12,29.57 79.95,28.75 79.95,26.2 U$41.P$2 | C29.1 80.05,30.5 79.12,29.57
N$106
  Top 0.813: U$40.P$2 79.56,36.02 C30.1
N$110
  Top 0.305: U$14.P$4 64.72,3.35 C19.2
VCC  (via drill 0.3, 0.5)
  Top 0.254: 41.07,15.5 41.07,14.53 44.4,11.2 44.4,8.12 U$1.P$64 44.27,5.7 | 41.07,15.5 41.07,16.05 | 41.07,16.05 U$1.P$21 41.15,23.67 C5.1 | 34.67,10.92 U$1.P$52 34.67,7.25 33.73,6.3 C2.2 | 34.67,10.92 39.15,15.4 40.97,15.4 41.07,15.5 | 44.27,5.7 44.27,5.25 | 55.85,12.32 U$2.P06 | 55.85,12.32 C6.2 | C4.2 45.92,5.3 45.08,5.3 C3.2 44.32,5.65 44.27,5.7 | 44.27,5.25 44.32,5.3 | v33.55,10.7 34.45,10.7 34.67,10.92 | 55.85,12.45 55.85,12.32 | v42.45,15.95 41.17,15.95 41.07,16.05 | 44.27,5.25 44.27,3.38 D1.C | U$7.P$26 U$7.P$25 U$7.P$24 21.27,11.32 v21.45,11.15 | U$7.P$16 U$7.P$17 19.68,6.7 20.8,6.7 21.45,7.35 v21.5,7.35 22.55,7.35 AUX1.2
  Top 0.305: R18.1 21.6,7.45 v21.5,7.35 | AUX2.1 29.68,37.52 29.65,37.55 | ICSP.5 67.19,21.71 65.9,23 65.9,26.3 66.75,27.15 66.75,28.49 | v59.3,11.25 59.3,11.55 59.1,11.75 59.1,12.05 58.83,12.32 U$2.P06 | v54.1,15.15 54.95,16 R19.1 55.05,15.75 55.05,12.85 55.45,12.45 55.85,12.45 | U$11.P$17 U$11.P$16 19.23,24.85 v20.65,24.85 | U$11.P$26 U$11.P$25 U$11.P$24 19.52,29.88 v20.45,30.8 21.43,30.8 FAN.1 | U$14.P$3 61.35,3.35 62,4 62,4.75 61.5,5.25 U$14.P$1 60.38,5.25 C18.2 58.95,4.72 v58.95,4.4
  Top 0.406: 29.7,37.6 29.7,37.55 | 29.7,37.6 29.95,37.85 42.15,37.85 45.15,34.85 | 29.68,37.52 29.68,37.58 29.7,37.6 | U$40.P$4 78.41,38.55 78.8,38.95 80.95,38.95 81.65,38.25 81.65,24.25 79.45,22.05 74.3,22.05 72.2,24.15 72.2,26.05 U$41.P$1 | 66.75,28.49 66.99,28.49 67.19,28.69 | AUX3.1 65.07,30.87 65.83,31.62
  Top 0.61: 45.05,34.85 44.9,34.85 43.75,33.7 43.75,28.4 41.52,26.18 C5.1
  Top 0.813: U$41.P$1 69.78,26.1 C31.+ 67.19,28.69 67,28.88 67,30.45 65.83,31.62 64.25,33.2 57.85,33.2 54.25,36.8 47.3,36.8 46.73,36.23 LASER.1 46.08,34.85 45.15,34.85 45.05,34.85
  Bottom 0.254: AUX1.2 26.52,4.02 27.95,5.45 28.3,5.45 v33.55,10.7 | v54.1,15.15 50.55,15.15 48.3,17.4 43.9,17.4 v42.45,15.95 | v21.45,11.15 21.45,7.4 v21.5,7.35
  Bottom 0.305: v20.45,30.8 20.45,25.05 v20.65,24.85 | FAN.1 25.32,32.17 AUX2.1 | v59.3,11.25 59.3,4.75 v58.95,4.4
VMOT  (via drill 0.5, 0.6)
  Top 0.254: C11.2 12.07,11.97
  Top 0.305: 12.07,11.97 U$7.P$4 | U$7.P$11 12.22,7.42 v11.35,6.55 | 12.18,30.52 U$11.P$4 11.03,30.52 v10.6,30.95 | C15.2 9.6,34 7.8,34 7.5,34.3 | v10.2,14.45 9,14.45 C13.1 | U$11.P$11 11.38,25.98 v10.75,25.35
  Top 0.61: v10.2,14.45 10.2,13.75 11.15,12.8 11.25,12.8 C11.2
  Top 0.813: 68.7,36.02 66.36,36.02 C32.+ 65.95,36.2 63.4,38.75 8.2,38.75 7.5,38.05 7.5,34.3 7.5,34.05 v10.6,30.95 | 68.7,36.02 U$40.P$7 | U$40.P$5 68.95,38.55 68.65,38.25 68.65,36.06 68.7,36.02 | C17.1 9.1,21.4 C14.+ 10.2,18 10.2,16.5 | C17.1 9.1,23.4 | v10.75,25.35 10.75,25 C17.1 | v10.2,14.45 10.2,16.5 | 10.2,16.5 10.15,16.55 4.1,16.55 3.18,17.47 3.18,18.25 2.72,18.25 24V.1
  Bottom 0.305: v11.35,6.55 11.35,13.3 v10.2,14.45
  Bottom 0.813: v10.6,30.95 11.25,30.3 11.25,25.85 v10.75,25.35

## Text on the board
tPlace: - | + | - | 2013 (c) Pryntech OpenSL 1.0 | + | + | + | - | +